# Altium PCB JTAG adapter.PcbDoc
Units mm, origin at the board's own origin, x right, y up, seen from the top; angles counter-clockwise.
Board outline 20 x 30 mm, 2 copper layers (L1, L2), stack 0.836 mm thick; 8 components, 9 nets, 40 pads, 10 vias.
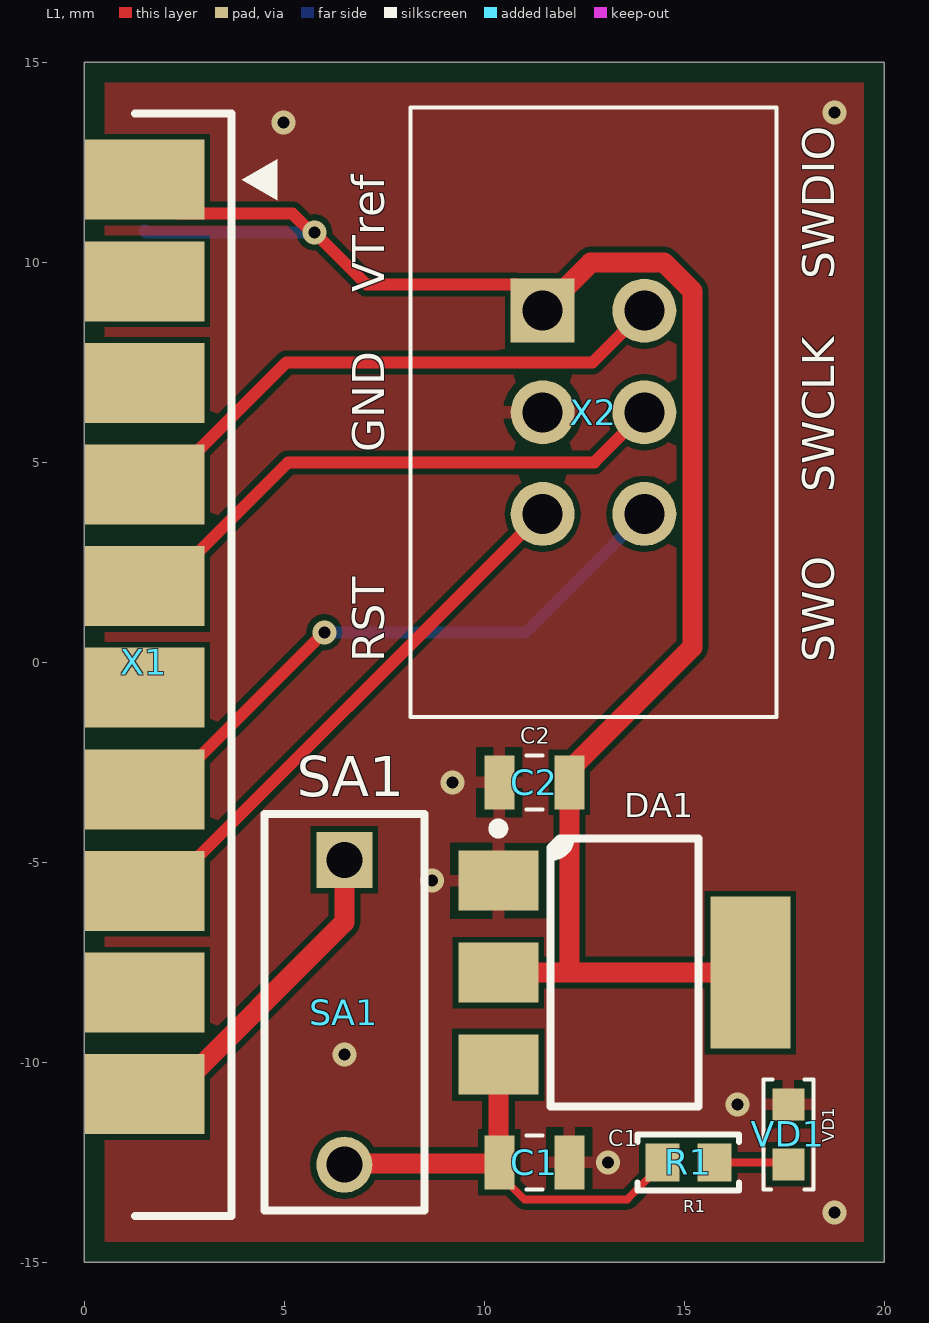
[diagram p0: L1 view]
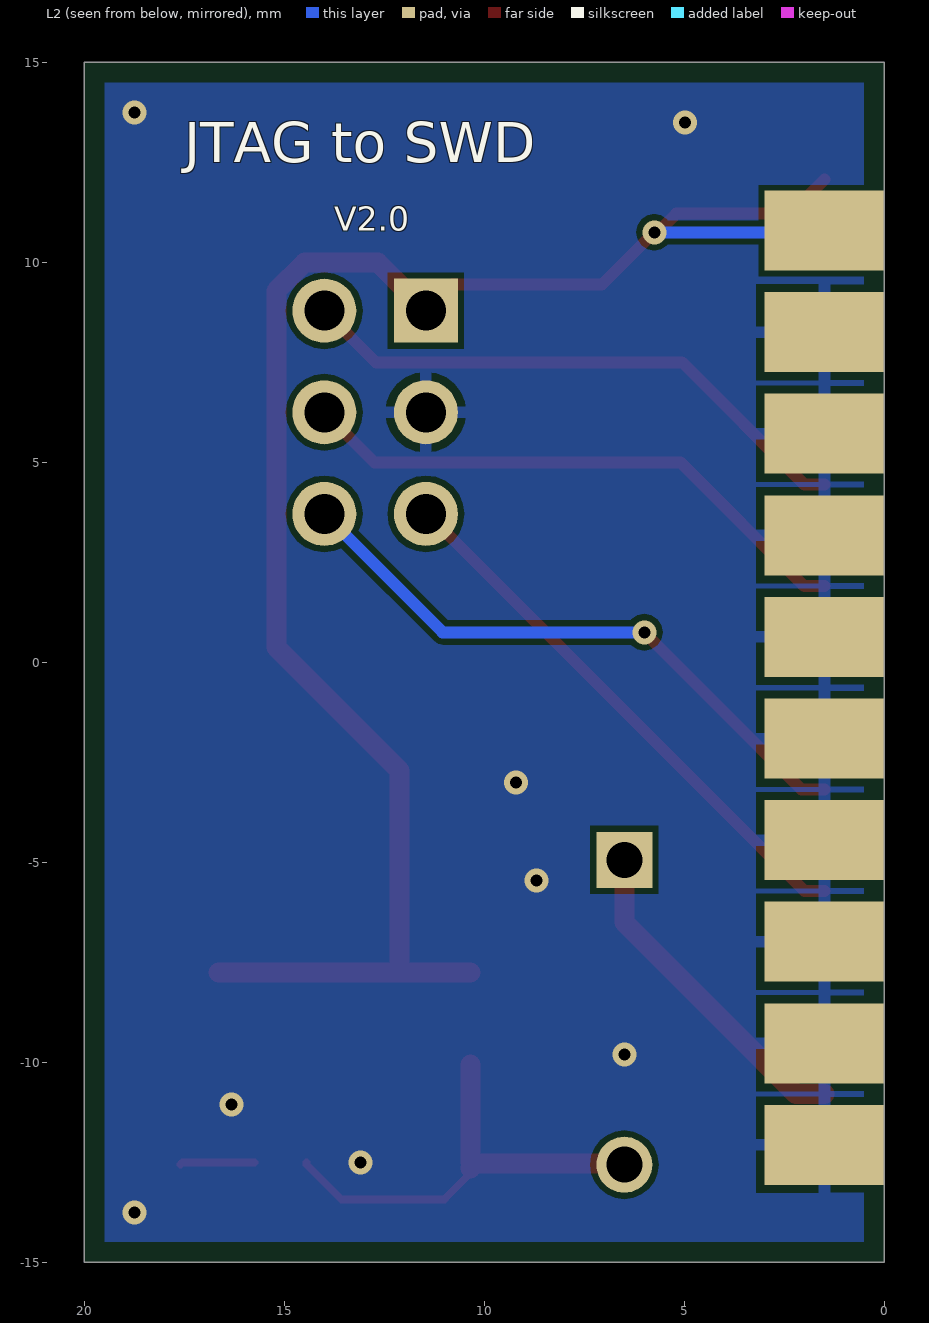
[diagram p1: L2 view, seen from below]
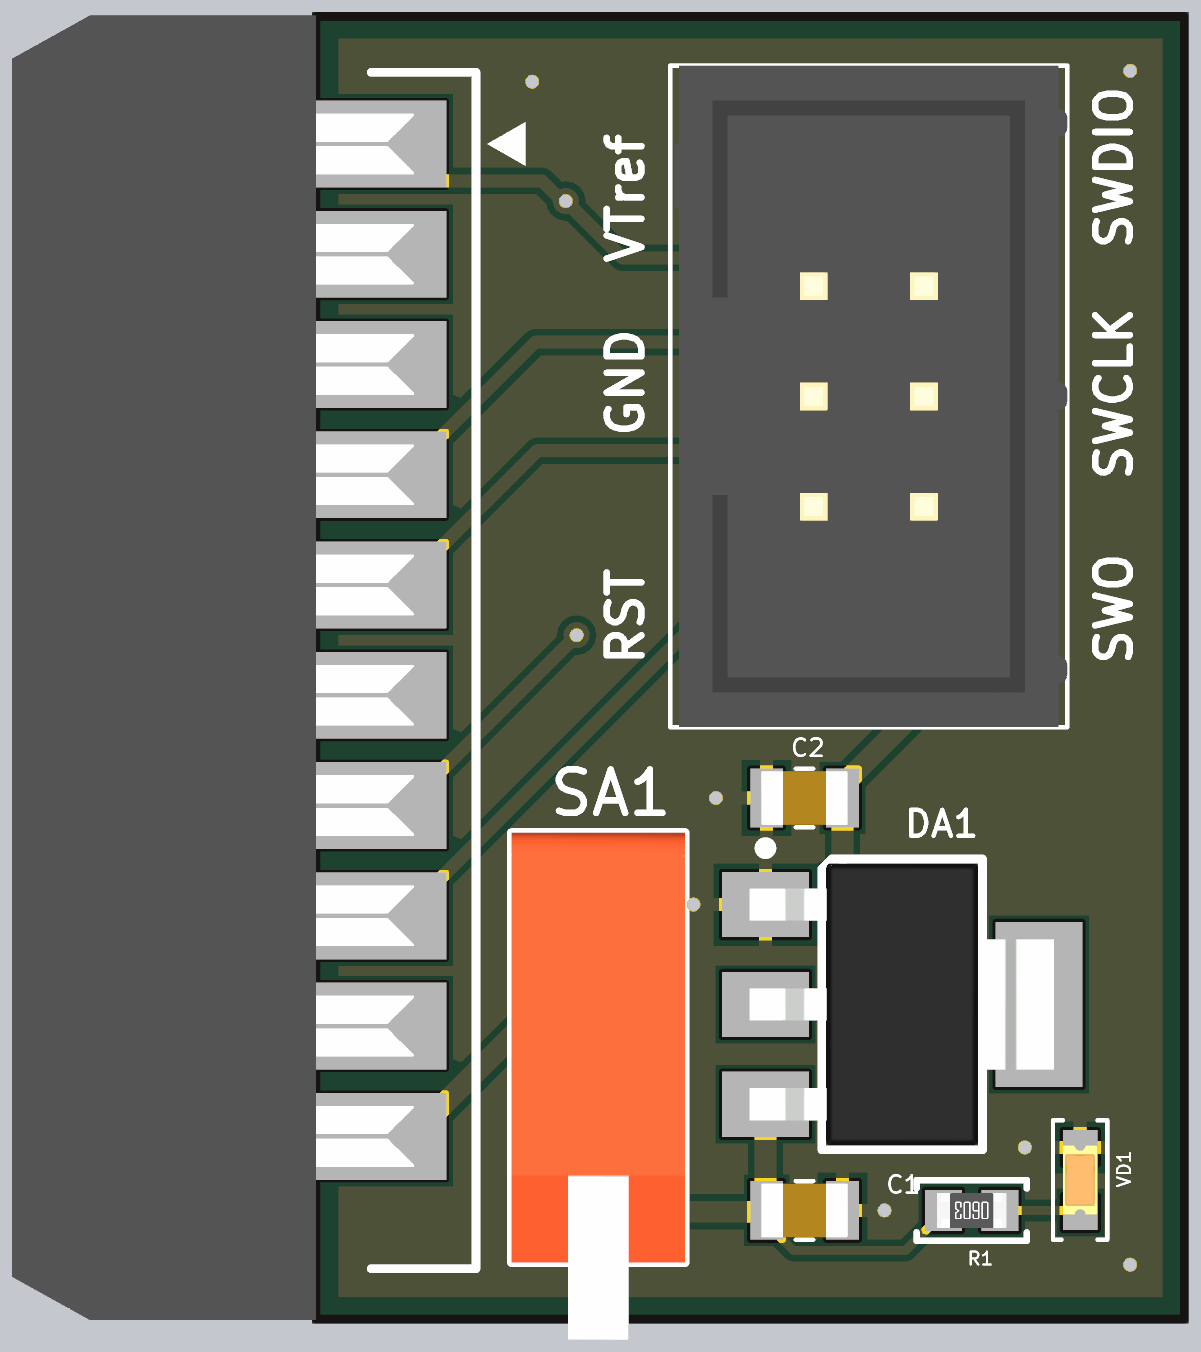
[diagram p2: 3D render of the assembled board from above, using the file's embedded part models]

## Layer stack, top to bottom
Top Solder: solder mask 0.03, Solder Resist, Dk 3.5
L1: signal copper 0.018
Core: core 0.8, FR-4, Dk 4.2
L2: signal copper 0.018
Bot Solder: solder mask 0.03, Solder Resist, Dk 3.5

## Board outline
0,-15 20,-15 20,15 0,15

## Design rules (kind name [scope] priority, off if disabled: settings)
BoardOutlineClearance BoardOutlineClearanceIDC-20F-EDGE [HasFootprint('IDC-20F-EDGE')] p1: gap=0 ignorepadtopadclearanceinfootprint=FALSE
BoardOutlineClearance KeepoutBoardOutline [(ObjectKind = 'Track') And (Keepout = 'True')] p2: gap=0 ignorepadtopadclearanceinfootprint=FALSE
BoardOutlineClearance [All] p3: gap=0.5 ignorepadtopadclearanceinfootprint=FALSE
Clearance ClearanceNetA1_1 [InNet('NetA1_1')] p1 off: gap=0.15 ignorepadtopadclearanceinfootprint=FALSE except(0.2: Arc-Fill Arc-Poly Arc-Region Track-Fill Track-Poly Track-Region)
Clearance ClearanceTopSilk [OnLayer('Top Silk') vs OnLayer('L1')] p2: gap=0.15 ignorepadtopadclearanceinfootprint=FALSE except(0: Arc-Hole Track-Hole SMDPad-Hole THPad-Hole Via-Hole Fill-Hole Poly-Hole Region-Hole Text-Hole)
Clearance ClearanceBalun [HasFootprint('BALF-NRG-01D3')] p3: gap=0.1 ignorepadtopadclearanceinfootprint=FALSE except(0: Arc-Hole Track-Hole SMDPad-Hole THPad-Hole Via-Hole Fill-Hole Poly-Hole Region-Hole Text-Hole) // BALF-NRG-01D3
Clearance ClearanceBalun_CC112X [HasFootprint('BALF-112X-01D3')] p4: gap=0.1 ignorepadtopadclearanceinfootprint=FALSE except(0: Arc-Hole Track-Hole SMDPad-Hole THPad-Hole Via-Hole Fill-Hole Poly-Hole Region-Hole Text-Hole) // BALF-NRG-01D3
Clearance ClearancePolygonANT [InNet('ANT') vs InPoly] p5: gap=0.45 ignorepadtopadclearanceinfootprint=FALSE except(0: Arc-Hole Track-Hole SMDPad-Hole THPad-Hole Via-Hole Fill-Hole Poly-Hole Region-Hole Text-Hole)
Clearance Wire_Jumpers [HasFootprint('WIRE')] p6: gap=0.01 ignorepadtopadclearanceinfootprint=FALSE except(0: Arc-Hole Track-Hole SMDPad-Hole THPad-Hole Via-Hole Fill-Hole Poly-Hole Region-Hole Text-Hole) // Pour over wire jumpers
Clearance VD [All vs HasFootprint('DPF(S-PX2SON-N6)')] p7: gap=0.1 ignorepadtopadclearanceinfootprint=FALSE except(0: Arc-Hole Track-Hole SMDPad-Hole THPad-Hole Via-Hole Fill-Hole Poly-Hole Region-Hole Text-Hole) // For small diods (ECD protection)
Clearance L1 [OnLayer('L1')] p8: gap=0.15 ignorepadtopadclearanceinfootprint=FALSE except(0: Arc-Hole Track-Hole SMDPad-Hole THPad-Hole Via-Hole Fill-Hole Poly-Hole Region-Hole Text-Hole)
Clearance L2 [OnLayer('L2')] p9: gap=0.15 ignorepadtopadclearanceinfootprint=FALSE except(0: Arc-Hole Track-Hole SMDPad-Hole THPad-Hole Via-Hole Fill-Hole Poly-Hole Region-Hole Text-Hole)
ComponentClearance PowerConnector [(ObjectKind = '3D Body') And (Identifier = '039012040')] p1: gap=0 collisioncheckmode=3 verticalgap=0 showdistances=FALSE
ComponentClearance MezzanineConnectors [InComponent('X7') or InComponent('X8') vs (ObjectKind = '3D Body') And (Identifier = 'mezzanine')] p2: gap=0 collisioncheckmode=3 verticalgap=0 showdistances=FALSE
ComponentClearance [(ObjectKind = '3D Body') And (Identifier = '039012040')] p3: gap=0 collisioncheckmode=3 verticalgap=0 showdistances=TRUE
ComponentOrientations [All] p1: allowedrotations=32
DiffPairsRouting [All] p1: maxlimit=0.4 minlimit=0.4 mostfreqgap=0.4 toplayer_minwidth=0.15 toplayer_maxwidth=0.3 toplayer_prefwidth=0.3 bottomlayer_minwidth=0.15 bottomlayer_maxwidth=0.3 bottomlayer_prefwidth=0.3 maxuncoupledlength=12.7
HoleSize [All] p1: absolutevalues=TRUE maxlimit=3 minlimit=0.3 maxpercent=80.000 minpercent=20.000
HoleToHoleClearance [All] p1: gap=0.1 allowstackedmicrovias=TRUE
MatchedLengths USB2 [InNetClass('USB2')] p1: tolerance=1 checknetsindiffpair=TRUE checkdiffpairvsdiffpair=FALSE checkxsignals=FALSE checkothers=FALSE
MatchedLengths USB1 [InNetClass('USB1')] p2: tolerance=1 checknetsindiffpair=TRUE checkdiffpairvsdiffpair=FALSE checkxsignals=FALSE checkothers=FALSE
MatchedLengths BLE_SPI [InNetClass('BLE_SPI')] p3: tolerance=1 checknetsindiffpair=TRUE checkdiffpairvsdiffpair=FALSE checkxsignals=FALSE checkothers=FALSE
MatchedLengths ACEEL_SPI [InNetClass('ACC_SPI')] p4: tolerance=1 checknetsindiffpair=TRUE checkdiffpairvsdiffpair=FALSE checkxsignals=FALSE checkothers=FALSE
MatchedLengths DEBUG_Lengths [InNetClass('DEBUG')] p5: tolerance=1 checknetsindiffpair=TRUE checkdiffpairvsdiffpair=FALSE checkxsignals=FALSE checkothers=FALSE
MinimumAnnularRing MinimumAnnularRing_1 [(ObjectKind = 'Via') And (AsMM(PadXSize_TopLayer) = 0.4)] p1: minimumring=0
MinimumAnnularRing [(ObjectKind = 'Via') And (AsMM(PadXSize_TopLayer) <> 0.4)] p2: minimumring=0.15
MinimumSolderMaskSliver [All] p1 off: minsoldermaskwidth=0.148
NetAntennae Keepout [(ObjectKind = 'Track') And (Keepout = 'True')] p1: netantennaetolerance=100
PlaneClearance [All] p1: clearance=0.15
PlaneConnect [All] p1: planeconnectstyle=Relief reliefexpansion=0.5 reliefentries=4 reliefconductorwidth=0.25 reliefairgap=0.15
PolygonConnect PolygonConnect_Vias [(ObjectKind = 'Via')] p1: connectstyle=Direct reliefconductorwidth=0.254 reliefentries=4 polygonreliefangle="90 Angle" airgapwidth=0.254
PolygonConnect PolygonConnect_L2 [OnLayer('L2')] p2: connectstyle=Relief reliefconductorwidth=0.3 reliefentries=4 polygonreliefangle="90 Angle" airgapwidth=0.2
PolygonConnect PolygonConnect_L1 [OnLayer('L1')] p3: connectstyle=Relief reliefconductorwidth=0.3 reliefentries=4 polygonreliefangle="90 Angle" airgapwidth=0.2
RoutingCorners [All] p1: cornerstyle=45-Degree minsetback=2.5 maxsetback=2.5
RoutingVias [All] p1: holewidth=0.3 width=0.7 viastyle="Through Hole" minholewidth=0.3 minwidth=0.4 maxholewidth=0.3 maxwidth=0.7
SMDEntry [All] p1: side=TRUE corner=TRUE anyangle=TRUE
SMDToCorner [All] p1: distance=0
SMDToPlane [All] p1: distance=0
ShortCircuit NoNet [Not InAnyNet vs Not InAnyNet] p1: allowed=TRUE
SilkToSilkClearance [All] p1: silktosilkclearance=0
SilkToSolderMaskClearance [IsPad] p1: minsilkscreentomaskgap=0.02 clearancetoexposedcopper=TRUE
SolderMaskExpansion SolderMaskKeepOut [OnLayer('Keepout')] p1: expansion=0.25
SolderMaskExpansion [All] p2: expansion=0.075
UnRoutedNet "Without GNDs" [not InNetClass('GND')] p1:
UnRoutedNet [All] p2 off:
Width "VD ESD" [InComponent('VD1')] p1: maxlimit=0.1 minlimit=0.1 preferedwidth=0.1
Width Width_GNDB [InNet('GNDB')] p2: maxlimit=0.254 minlimit=0.23 preferedwidth=0.23
Width Width_+V_BLE [InNet('+V_BLE')] p3: maxlimit=0.3 minlimit=0.23 preferedwidth=0.23
Width Width_GND [InNetClass('GND')] p4: maxlimit=5 minlimit=0.15 preferedwidth=0.3
Width Width_VDD [InNetClass('POWER')] p5: maxlimit=5 minlimit=0.15 preferedwidth=0.3
Width [All] p6: maxlimit=5 minlimit=0.15 preferedwidth=0.2
17 further rules are at their usual default settings.

## Components (designator, comment, footprint, x,y, rotation, side; value= is the part's Value field where it differs from the comment)
C1 "10u" MLCC-CC0805 11.25,-12.5 r0 top
C2 "10u" MLCC-CC0805 11.25,-3 r180 top
DA1 "=Value" "ON SEMI SOT-223 ST(318H)" 13.5,-7.755 r0 top
R1 "220" R0603 15.1,-12.5 r180 top
SA1 "DS1040-01RT" DS1040-01RT 6.5,-8.75 r0 top
VD1 "BL-LS0603UHR" "LED R0603 RED" 17.6,-11.8 r270 top value=20mA
X1 "Connector-20" IDC-20F-EDGE 0,0 r90 top locked
X2 "Connector-6" BH-6 11.46,8.79 r270 top

## Footprints (in the part's own frame and the unit in brackets; to place one, negate y for a bottom-side part, rotate by r counter-clockwise, add the part's x,y. Pads: shape width x height; smd on the part's side, far side on the other; paste and mask are expansions set on the pad)
BH-6 [mm]
  rect 1.6x1.6 hole 1 paste+1 mask+0.1: 1(0,0)
  round 1.6 hole 1 paste+1 mask+0.1: 2(0,2.54) 3(2.54,0) 4(2.54,2.54) 5(5.08,0) 6(5.08,2.54)
  silkscreen extent -5.08,-3.3 10.16,5.84, body extent -5.08,-3.2 10.16,5.85, height 9.1
DS1040-01RT [mm]
  rect 1.4x1.4 hole 0.9: 1(0,3.81)
  round 1.4 hole 0.9: 2(0,-3.81)
  silkscreen extent -2,-4.95 2,4.95, body extent -2,-6.75 2,4.95, height 8.05
IDC-20F-EDGE [mm]
  rect 2x3 smd mask+0.06: 1(12.065,-1.5) 3(9.525,-1.5) 5(6.985,-1.5) 7(4.445,-1.5) 9(1.905,-1.5) 11(-0.635,-1.5) 13(-3.175,-1.5) 15(-5.715,-1.5) 17(-8.255,-1.5) 19(-10.795,-1.5)
  rect 2x3 smd far side mask+0.06: 2(10.795,-1.5) 4(8.255,-1.5) 6(5.715,-1.5) 8(3.175,-1.5) 10(0.635,-1.5) 12(-1.905,-1.5) 14(-4.445,-1.5) 16(-6.985,-1.5) 18(-9.525,-1.5) 20(-12.065,-1.5)
  silkscreen extent -13.84,-4.83 13.72,-1.27, body extent -15.03,-2.25 15.03,7, height 3.44
"LED R0603 RED" [mm]
  rect 0.8x0.8 smd: 1(-0.75,0) 2(0.75,0)
  silkscreen extent -1.38,-0.63 1.38,0.63, body extent -0.8,-0.4 0.8,0.4, height 0.8
MLCC-CC0805 [mm]
  rect 0.75x1.35 smd: 1(-0.875,0) 2(0.875,0)
  silkscreen extent -0.2,-0.67 0.2,0.67, body extent -1,-0.62 1,0.63, height 1
"ON SEMI SOT-223 ST(318H)" [mm] "SOT223, 4-Leads, Body 6.50x7.00mm (avg), Pitch 2.30mm, IPC Medium Density"
  rect 2x1.5 smd: 1(-3.15,2.3) 2(-3.15,0) 3(-3.15,-2.3)
  rect 2x3.8 smd: 4(3.15,0)
  silkscreen extent -3.27,-3.35 1.85,3.72, body extent -3.52,-3.25 3.5,3.25, height 1.8
R0603 [mm] "Chip Resistor, 2-Leads, Body 1.60x0.80mm, IPC Medium Density"
  rect 0.85x0.95 smd: 1(-0.65,0) 2(0.65,0)
  silkscreen extent -1.27,-0.7 1.27,0.7, body extent -0.8,-0.4 0.8,0.4, height 0.45

## Part data
C1 C2: library part "CC0805 10uF 10V X5R 10%", "CC0805 10uF 10V X5R 10%", Package=CC0805, Part Number=GRM21BR61A106KE19L, Component Name="CC0805 10uF 10V X5R 10%", HelpURL=https://product.tdk.com/en/search/capacitor/ceramic/mlcc/list#pn=C2012X5R1A106K&_l=20&_p=1&_c=part_no-part_no&_d=0, Pins=2, Price=0.002, Vendor=TDK
DA1: library part LD1117STR, "LDO ADJ 0.8mA", Package=SOT-223, Component Name=LD1117STR, HelpURL=https://www.chipdip.ru/product/ld1117str-2, Part Number=LD1117STR, Pins=4, Vendor=ON
R1: library part "R0603 220 1%", "1/10W 75V", Package=R0603, Part Number=CR-03FL5--220R, Power=1/10W, Component Name="R0603 220 1%", HelpURL=http://www.vikingamerica.com/ftp/CR.pdf, Pins=2, Price=0.0009, Vendor=Viking
VD1: "LER 0603 Red", Package="LED 0603", Component Name=BL-LS0603UHR, HelpURL=https://www.chipdip.ru/product/bl-ls0603uhr, Part Number=BL-LS0603UHR, Pins=2
X1: library part SFH11-XXXC-D10-RA-BK, "2x10, 2.54mm pitch, 90 angle, female with key", Component Name=SFH11-XXXC-D10-RA-BK, Part Number=SFH11-XXXC-D10-RA-BK, Pins=20
X2: library part BH-6, "2.54mm pitch, 6pin with housing", Component Name=BH-6, Part Number=BH-6, Pins=6
SA1: Component Name=DS1040-01RT, HelpURL=https://www.chipdip.ru/product/ds1040-01rt, Part Number=DS1040-01RT, Pins=2, Vendor=Connfly

## Via types
v1: diameter 0.6, hole 0.3, L1 to L2, tented both sides, 10 vias

## Nets (pads, with @x,y where several pads share a name; then routed paths per layer and width w, separated by ;. In a path a pad name is that pad's centre, name@x,y a point inside that pad or via, vN(x,y) a via of type N, cw(c..) or ccw(c..) an arc to the next point about the centre after c; other vN are vias at no path point)
5V: SA1.1 X1.19 | length 8.3
  L1 w0.5: X1.19 2.205,-10.795 6.5,-6.5 SA1.1
GND: C1.2 C2.2 DA1.1 VD1.1 X1.4 X1.6 X1.8 X1.10 X1.12 X1.14 X1.16 X1.18 X1.20 X2.3
  other v1: 18.75,-13.75 13.092,-12.5 16.325,-11.05 6.5,-9.8 8.693,-5.455 9.21,-3 4.978,13.5 18.75,13.75
NetC1_1: C1.1 DA1.3 R1.2 SA1.2 | length 11.3
  L1 w0.2: C1.1@10.35,-12.66 10.35,-12.775 11,-13.425 13.575,-13.425 14.45,-12.55 R1.2 ; C1.1@10.35,-12.5 C1.1
  L1 w0.5: SA1.2 6.53,-12.53 10.25,-12.53 10.35,-12.63 C1.1@10.35,-12.66 ; C1.1@10.35,-12.5 DA1.3
NetR1_1: R1.1 VD1.2 | length 1.9
  L1 w0.2: R1.1 17.55,-12.5 VD1.2
RST: X1.15 X2.5 | length 13.9
  L1 w0.3: X1.15 2,-5.715 11.167,3.452 11.202,3.452 X2.5
SWCLK: X1.9 X2.4 | length 14.1
  L1 w0.3: X1.9 2,1.905 5.095,5 12.75,5 X2.4@13.875,6.125
SWDIO: X1.7 X2.2 | length 14.3
  L1 w0.3: X1.7 2,4.445 5.055,7.5 12.71,7.5 X2.2
SWO: X1.13 X2.6 | length 15.4
  L1 w0.3: X1.13 2.075,-3.175 v1(6,0.75)
  L2 w0.3: v1(6,0.75) 11.04,0.75 X2.6
VTref: C2.1 DA1.2 DA1.4 X1.1 X1.2 X2.1 | length 44.7
  L1 w0.3: X1.1 2.35,11.215 5.204,11.215 5.669,10.75 v1(5.75,10.75) 7.06,9.44 10.81,9.44 X2.1
  L1 w0.5: DA1.2 12.125,-7.755 ; X2.1 12.66,9.99 14.497,9.99 15.2,9.287 15.2,0.375 12.125,-2.7 12.125,-7.755 ; DA1.4 12.125,-7.755
  L2 w0.3: X1.2 1.545,10.75 v1(5.75,10.75)
pads on no net: X1.3 X1.5 X1.11 X1.17

## Polygon pours and split planes (outlines as drawn)
GND on L1 "L1" (solid, pour order 6): 0,15 25,15 25,-15 0,-15
GND on L2 "L2" (solid, pour order 4): 0,15 25,15 25,-15 0,-15

## Silkscreen, mask and mechanical layers (free items; w line width, h text height)
Top Overlay:
  text "SWDIO" at 18.75,9.575 h0.8 r90
  text "VTref" at 7.5,9.25 h0.8 r90
  text "GND" at 7.5,5.25 h0.8 r90
  text "SWCLK" at 18.75,4.25 h0.8 r90
  text "RST" at 7.5,0 h0.8 r90
  text "SWO" at 18.75,0 h0.8 r90
Bot Overlay:
  text "JTAG to SWD" at 17.5,12.5 h1
  text "V2.0" at 13.752,10.795 h0.6
Top Solder:
  the board outline again, w0.2
Bot Solder:
  the board outline again, w0.2
Board:
  the board outline again, w0.2

## Dimensions
20,-15 to 0,-15 on Dimensions
20,-15 to 20,15 on Dimensions